# EAGLE board CT_schematic (EAGLE 7.6.0)

Size 100 x 80 mm. Coordinates in mm from the lower left corner, seen from the top.
Outline: 0,0 100,0 100,80 0,80 0,0
Copper layers (1*16): Top 0.035mm / dielectric 1.5mm / Bottom 0.035mm
Design rules "default": minimum track width 10mil, minimum drill 24mil, track to track 8mil, track to pad 8mil, pad to pad 8mil, via to via 8mil, smd to smd 8mil, copper to edge 40mil, drill to drill 8mil, minimum pad ring 10mil, minimum via ring 8mil, stop-mask expansion 4mil, vias tented up to drill 0mil, thermal gap 10mil

## Footprints (pad centres in the part's own frame; a part is rotated, then mirrored left to right if it is on the bottom)
C0603 = smd 0.8 x 0.8: 1 -0.762,0; 2 0.762,0
C0402 = smd 0.5 x 0.5: 1 -0.508,0; 2 0.508,0
C0805 = smd 1.2 x 1.3: 1 -1.016,0; 2 1.016,0
EXV-9B = smd 2.718 x 1.778: 1 -2.108,0; 2 2.108,0
EXV-9H = smd 3.505 x 1.676: 1 -2.857,0; 2 2.857,0
PJ-037B_PACKAGE = drill 3.7 square: 1 12,0 | drill 3.2 square: 2 6,0
R0603 = smd 0.8 x 0.8: 1 -0.762,0; 2 0.762,0
WLCSP64 = smd 0.34 x 0.34: A1 -1.75,1.75; A2 -1.25,1.75; A3 -0.75,1.75; A4 -0.25,1.75; A5 0.25,1.75; A6 0.75,1.75; A7 1.25,1.75; A8 1.75,1.75; B1 -1.75,1.25; B2 -1.25,1.25; B3 -0.75,1.25; B4 -0.25,1.25; B5 0.25,1.25; B6 0.75,1.25; B7 1.25,1.25; B8 1.75,1.25; C1 -1.75,0.75; C2 -1.25,0.75; C3 -0.75,0.75; C4 -0.25,0.75; C5 0.25,0.75; C6 0.75,0.75; C7 1.25,0.75; C8 1.75,0.75; D1 -1.75,0.25; D2 -1.25,0.25; D3 -0.75,0.25; D4 -0.25,0.25; D5 0.25,0.25; D6 0.75,0.25; D7 1.25,0.25; D8 1.75,0.25; E1 -1.75,-0.25; E2 -1.25,-0.25; E3 -0.75,-0.25; E4 -0.25,-0.25; E5 0.25,-0.25; E6 0.75,-0.25; E7 1.25,-0.25; E8 1.75,-0.25; F1 -1.75,-0.75; F2 -1.25,-0.75; F3 -0.75,-0.75; F4 -0.25,-0.75; F5 0.25,-0.75; F6 0.75,-0.75; F7 1.25,-0.75; F8 1.75,-0.75; G1 -1.75,-1.25; G2 -1.25,-1.25; G3 -0.75,-1.25; G4 -0.25,-1.25; G5 0.25,-1.25; G6 0.75,-1.25; G7 1.25,-1.25; G8 1.75,-1.25; H1 -1.75,-1.75; H2 -1.25,-1.75; H3 -0.75,-1.75; H4 -0.25,-1.75; H5 0.25,-1.75; H6 0.75,-1.75; H7 1.25,-1.75; H8 1.75,-1.75
10100565 = smd 0.8 x 2.35: 1 0,0; 2 1.25,0; 3 2.55,0; 4 4.25,0; 5 5.43,0; 6 6.68,0; 7 7.93,0; 8 9.18,0; 9 11.67,0; 10 14.18,0; 11 15.43,0; 12 16.68,0; 13 17.93,0; 14 19.18,0; 15 21.68,0 | smd 1.5 x 3.1: 16 23.495,-1.375; 20 25.685,-22.875 | smd 1.55 x 3.1: 17 -1.815,-1.375; 21 -1.815,-22.875 | drill 1.1 pad 1.1: 18 21.68,-2.375; 19 0.68,-2.375
DFN8-S = smd 0.6 x 0.4: 1 -2.69,1.905; 2 -2.69,0.635; 3 -2.69,-0.635; 4 -2.69,-1.905; 5 2.69,-1.905; 6 2.69,-0.635; 7 2.69,0.635; 8 2.69,1.905
WNG008 = smd 0.45 x 0.55: 1 -1.27,0; 2 0,0; 3 1.27,0; 4 2.54,0; 5 2.54,7.5; 6 1.27,7.5; 7 0,7.5; 8 -1.27,7.53 | smd 4.9 x 4.75: PAD 0.635,3.75
SOIC-8 = smd 1.6 x 0.6: 1 -2.7,1.905 | smd 1.55 x 0.6: 2 -2.7,0.635; 3 -2.7,-0.635; 4 -2.7,-1.905; 5 2.7,-1.905; 6 2.7,-0.635; 7 2.7,0.635; 8 2.7,1.905
182-009-MALE = drill 1.194 pad 1.524 octagon: 1 -5.537,10.923; 2 -2.769,10.923; 3 0,10.923; 4 2.769,10.923; 5 5.537,10.923; 6 -4.153,8.08; 7 -1.384,8.08; 8 1.384,8.08; 9 4.153,8.08 | hole 3.048: -12.446,9.501; 12.446,9.501
WFDN-8 = smd 0.48 x 0.7: 1 0,0; 2 1.27,0; 3 2.54,0; 4 3.81,0; 5 3.81,4.45; 6 2.54,4.45; 7 1.27,4.45; 8 0,4.45 | smd 4 x 3: 9 1.89,2.25
ASEK = smd 1.4 x 1: 1 -1.1,-0.8; 2 1.1,-0.8; 3 1.1,0.8; 4 -1.1,0.8
ASFL1 = smd 1.7 x 1.5: 1 -1.27,-1.1; 2 1.27,-1.1; 3 1.27,1.1; 4 -1.27,1.1
LP2954 = smd 1.6 x 0.6: 1 -2.475,1.905 | smd 1.55 x 0.6: 2 -2.475,0.635; 3 -2.475,-0.635; 4 -2.475,-1.905; 5 2.475,-1.905; 6 2.475,-0.635; 7 2.475,0.635; 8 2.475,1.905
SON-6 = smd 0.55 x 0.3: 1 -0.355,0.5 | smd 0.52 x 0.3: 2 -0.37,0; 3 -0.37,-0.5; 4 0.37,-0.5; 5 0.37,0; 6 0.37,0.5
SW_4-1437565-2 = smd 1.4 x 2.1: 1 -2.23,4.55; 2 -2.23,-4.55; 3 2.23,4.55; 4 2.23,-4.55
LGM67K-G1J2-24-Z = smd 0.8 x 1.4: A -2,0; C 0,0
NC7SZ125M5X = smd 1.3 x 0.7: 1 -1.3,0.95; 2 -1.3,0; 3 -1.3,-0.95; 4 1.3,-0.95; 5 1.3,0.95

## Placement (x,y rotation side)
C1  1e-06  [C0603]  -15.24,85.09 0 top  (outside the outline)
C2  1e-07  [C0603]  -19.05,85.09 0 top  (outside the outline)
C3  1e-07  [C0603]  -22.86,85.09 0 top  (outside the outline)
C4  1e-07  [C0603]  -26.67,85.09 0 top  (outside the outline)
C5  1e-07  [C0603]  -30.48,85.09 0 top  (outside the outline)
C6  1e-07  [C0603]  -34.29,85.09 0 top  (outside the outline)
C7  4.7e-06  [C0603]  -80.01,80.01 0 top  (outside the outline)
C8  1e-08  [C0603]  -38.1,85.09 0 top  (outside the outline)
C9  1e-06  [C0603]  -41.91,85.09 0 top  (outside the outline)
C10  1e-07  [C0603]  -45.72,85.09 0 top  (outside the outline)
C11  1e-07  [C0402]  -72.39,85.09 0 top  (outside the outline)
C12  1e-05  [C0805]  -63.5,67.31 0 top  (outside the outline)
C13  1e-08  [C0402]  -76.2,85.09 0 top  (outside the outline)
C14  1e-08  [C0402]  -80.01,85.09 0 top  (outside the outline)
C15  1e-07  [C0402]  -15.24,90.17 0 top  (outside the outline)
C16  1e-07  [C0402]  -19.05,90.17 0 top  (outside the outline)
C17  1e-08  [C0402]  -22.86,90.17 0 top  (outside the outline)
C18  1e-08  [C0402]  -26.67,90.17 0 top  (outside the outline)
C19  1e-06  [EXV-9B]  -40.64,67.31 0 top  (outside the outline)
C20  2.2e-06  [EXV-9B]  -49.53,67.31 0 top  (outside the outline)
C21  1e-07  [C0402]  -30.48,90.17 0 top  (outside the outline)
C22  0.0001  [EXV-9H]  -71.12,58.42 0 top  (outside the outline)
C23  0.0001  [EXV-9H]  -17.78,68.58 0 top  (outside the outline)
C24  1e-08  [C0402]  -34.29,90.17 0 top  (outside the outline)
J1  PJ-037B  [PJ-037B_PACKAGE]  -27.94,36.83 0 top  (outside the outline)
R2  1000.0  [R0603]  -49.53,85.09 0 top  (outside the outline)
R4  4700.0  [R0603]  -53.34,85.09 0 top  (outside the outline)
R5  2200.0  [R0603]  -57.15,85.09 0 top  (outside the outline)
R6  2200.0  [R0603]  -60.96,85.09 0 top  (outside the outline)
R7  10000.0  [R0603]  -35.56,80.01 0 top  (outside the outline)
R8  100000.0  [R0603]  -73.66,66.04 0 top  (outside the outline)
R9  100000.0  [R0603]  -78.74,66.04 0 top  (outside the outline)
R10  100000.0  [R0603]  -15.24,74.93 0 top  (outside the outline)
R11  100000.0  [R0603]  -20.32,74.93 0 top  (outside the outline)
R12  100000.0  [R0603]  -25.4,74.93 0 top  (outside the outline)
R13  100000.0  [R0603]  -30.48,74.93 0 top  (outside the outline)
R14  100000.0  [R0603]  -35.56,74.93 0 top  (outside the outline)
R15  100000.0  [R0603]  -40.64,74.93 0 top  (outside the outline)
R16  100000.0  [R0603]  -45.72,74.93 0 top  (outside the outline)
R17  100000.0  [R0603]  -50.8,74.93 0 top  (outside the outline)
R18  100000.0  [R0603]  -55.88,74.93 0 top  (outside the outline)
R19  10000.0  [R0603]  -40.64,80.01 0 top  (outside the outline)
R20  10000.0  [R0603]  -45.72,80.01 0 top  (outside the outline)
R21  10000.0  [R0603]  -50.8,80.01 0 top  (outside the outline)
R22  10000.0  [R0603]  -55.88,80.01 0 top  (outside the outline)
R23  10000.0  [R0603]  -60.96,80.01 0 top  (outside the outline)
R24  10000.0  [R0603]  -66.04,80.01 0 top  (outside the outline)
R25  120.0  [R0603]  -64.77,85.09 0 top  (outside the outline)
R26  470000.0  [R0603]  -60.96,74.93 0 top  (outside the outline)
R27  100000.0  [R0603]  -66.04,74.93 0 top  (outside the outline)
R28  100000.0  [R0603]  -71.12,74.93 0 top  (outside the outline)
R29  100000.0  [R0603]  -76.2,74.93 0 top  (outside the outline)
R30  100000.0  [R0603]  -81.28,74.93 0 top  (outside the outline)
R31  100000.0  [R0603]  -15.24,80.01 0 top  (outside the outline)
R32  164658.62  [R0603]  -68.58,66.04 0 top  (outside the outline)
R33  100000.0  [R0603]  -20.32,80.01 0 top  (outside the outline)
R34  10000.0  [R0603]  -71.12,80.01 0 top  (outside the outline)
R35  10000.0  [R0603]  -76.2,80.01 0 top  (outside the outline)
R36  9100.0  [R0603]  -68.58,85.09 0 top  (outside the outline)
R37  680000.0  [R0603]  -25.4,80.01 0 top  (outside the outline)
R38  120000.0  [R0603]  -30.48,80.01 0 top  (outside the outline)
U1  STM32L433RBY6  [WLCSP64]  -41.91,59.69 0 top  (outside the outline)
U2  10100565  [10100565]  -40.64,25.4 0 top  (outside the outline)
U3  24AA512-I/MF  [DFN8-S]  -43.18,49.53 0 top  (outside the outline)
U4  S25FL128SDPNFI001  [WNG008]  -64.77,33.02 0 top  (outside the outline)
U5  SN65HVD230D  [SOIC-8]  -72.39,48.26 0 top  (outside the outline)
U6  182-009-113R531  [182-009-MALE]  -67.31,6.35 0 top  (outside the outline)
U7  SST26VF032B-104I/MF  [WFDN-8]  -31.75,46.99 0 top  (outside the outline)
U8  ASEK-32.768KHz-ECST  [ASEK]  -62.23,58.42 0 top  (outside the outline)
U9  ASFL1-25MHZ-NCS  [ASFL1]  -26.67,59.69 0 top  (outside the outline)
U10  LP2954AIMX/NOPB  [LP2954]  -58.42,48.26 0 top  (outside the outline)
U11  TPS3895ADRYR  [SON-6]  -36.83,88.9 0 top  (outside the outline)
U12  4-1437565-2  [SW_4-1437565-2]  -44.45,35.56 0 top  (outside the outline)
U13  Q65110A2395  [LGM67K-G1J2-24-Z]  -27.94,67.31 0 top  (outside the outline)
U14  nc7sz125m5x  [NC7SZ125M5X]  -57.15,66.04 0 top  (outside the outline)

## Library data of the parts
C1-C24 J1 R2 R4-R38 U1-U14 = circuit_tree

## Nets
CLK_U1_C8: U1.C8 U8.3
CLK_U1_D8: U1.D8 U9.3
GND: C1.2 C2.2 C3.2 C4.2 C5.2 C6.2 C7.2 C8.2 C9.2 C10.2 C11.2 C12.2 C13.2 C14.2 C15.2 C16.2 C17.2 C18.2 C19.2 C20.2 C21.2 C22.2 C23.2 C24.2 J1.2 R2.2 R7.2 R20.2 R26.2 R33.2 R36.2 R38.2 U1.A7 U1.B1 U1.F8 U1.H2 U1.H8 U2.6 U2.10 U2.12 U2.16 U2.17 U2.20 U2.21 U3.4 U3.7 U4.4 U4.PAD U5.2 U6.5 U7.4 U7.9 U8.2 U9.2 U10.4 U11.2 U13.C U14.1 U14.3
NET_U1_A6: R6.1 U1.A6 U3.5
NET_U1_B5: R5.1 U1.B5 U3.6
NET_U1_C5: R7.1 U1.C5
NET_U1_D6: R4.1 U1.D6 U14.4
NET_U1_H3: U13.A
NET_U1_H4: U12.3 U12.4
NET_U2_1: R10.1 U2.1
NET_U2_2: R9.1 U2.2
NET_U2_18: U2.18 U2.19
NET_U3_1: R19.1 U3.1
NET_U3_2: R20.1 U3.2
NET_U3_3: R21.1 U3.3
NET_U4_3: R22.1 U4.3
NET_U4_7: R24.1 U4.7
NET_U5_6: R25.2 U5.6
NET_U5_8: R26.1 U5.8
NET_U6_2: R25.2 U5.6 U6.2
NET_U6_3: R25.1 U5.7 U6.3
NET_U10_3: R31.1 U10.3
NET_U10_5: R30.1 U10.5
NET_U10_7: R32.2 R33.1 U10.7
NET_U11_1: R35.1 R36.1 U11.1
NET_U11_3: R37.2 R38.1 U11.3
NET_U11_4: R34.1 U11.4 U14.2
NET_U12_1: R2.1 U12.1 U12.2
PROC_CAN1_RX: U1.D3 U5.4
PROC_CAN1_TX: U1.C1 U5.1
PROC_QUADSPI_BK1_IO0: U1.H5 U7.5
PROC_QUADSPI_BK1_IO1: U1.F4 U7.2
PROC_QUADSPI_BK1_IO2: R28.1 U1.H6 U7.3
PROC_QUADSPI_BK1_IO3: R29.1 U1.G5 U7.7
PROC_QUADSPI_BK1_NCS: R27.1 U1.F6 U7.1
PROC_QUADSPI_CLK: U1.G6 U7.6
PROC_SDMMC1_CK: R8.1 U1.A3 U2.8
PROC_SDMMC1_D0: R11.1 U1.F3 U2.4
PROC_SDMMC1_D1: R12.1 U1.E2 U2.3
PROC_SDMMC1_D2: R13.1 U1.C3 U2.15
PROC_SDMMC1_D3: R14.1 U1.B3 U2.14
PROC_SDMMC1_D4: R15.1 U1.C6 U2.13
PROC_SDMMC1_D5: R16.1 U1.B6 U2.11
PROC_SDMMC1_D6: R17.1 U1.F1 U2.7
PROC_SDMMC1_D7: R18.1 U1.E1 U2.5
PROC_SPI1_MISO: U4.2
PROC_SPI1_MOSI: U4.5
PROC_SPI1_NSS: R23.1 U4.1
PROC_SPI1_SCK: U4.6
VCC_S1_6V4: C19.1 C22.1 C23.1 J1.1 R31.2 U10.8
VCC_TIER1_3V3: C1.1 C2.1 C3.1 C4.1 C5.1 C6.1 C7.1 C8.1 C9.1 C10.1 C11.1 C12.1 C13.1 C14.1 C15.1 C16.1 C17.1 C18.1 C20.1 C21.1 C24.1 R4.2 R5.2 R6.2 R8.2 R9.2 R10.2 R11.2 R12.2 R13.2 R14.2 R15.2 R16.2 R17.2 R18.2 R19.2 R21.2 R22.2 R23.2 R24.2 R27.2 R28.2 R29.2 R30.2 R32.1 R34.2 R35.2 R37.1 U1.A1 U1.A8 U1.B7 U1.G8 U1.H1 U1.H7 U2.9 U3.8 U4.8 U5.3 U7.8 U8.4 U9.4 U10.1 U11.6 U14.5

## Tracks (layer width: path | path; a pad name or v marks a point on that pad's centre or on a via)
CLK_U1_C8  (1 unrouted)
CLK_U1_D8  (1 unrouted)
GND  (58 unrouted)
NET_U1_A6  (2 unrouted)
NET_U1_B5  (2 unrouted)
NET_U1_C5  (1 unrouted)
NET_U1_D6  (2 unrouted)
NET_U1_H4  (1 unrouted)
NET_U2_1  (1 unrouted)
NET_U2_2  (1 unrouted)
NET_U2_18  (1 unrouted)
NET_U3_1  (1 unrouted)
NET_U3_2  (1 unrouted)
NET_U3_3  (1 unrouted)
NET_U4_3  (1 unrouted)
NET_U4_7  (1 unrouted)
NET_U5_6  (1 unrouted)
NET_U5_8  (1 unrouted)
NET_U6_2  (2 unrouted)
NET_U6_3  (2 unrouted)
NET_U10_3  (1 unrouted)
NET_U10_5  (1 unrouted)
NET_U10_7  (2 unrouted)
NET_U11_1  (2 unrouted)
NET_U11_3  (2 unrouted)
NET_U11_4  (2 unrouted)
NET_U12_1  (2 unrouted)
PROC_CAN1_RX  (1 unrouted)
PROC_CAN1_TX  (1 unrouted)
PROC_QUADSPI_BK1_IO0  (1 unrouted)
PROC_QUADSPI_BK1_IO1  (1 unrouted)
PROC_QUADSPI_BK1_IO2  (2 unrouted)
PROC_QUADSPI_BK1_IO3  (2 unrouted)
PROC_QUADSPI_BK1_NCS  (2 unrouted)
PROC_QUADSPI_CLK  (1 unrouted)
PROC_SDMMC1_CK  (2 unrouted)
PROC_SDMMC1_D0  (2 unrouted)
PROC_SDMMC1_D1  (2 unrouted)
PROC_SDMMC1_D2  (2 unrouted)
PROC_SDMMC1_D3  (2 unrouted)
PROC_SDMMC1_D4  (2 unrouted)
PROC_SDMMC1_D5  (2 unrouted)
PROC_SDMMC1_D6  (2 unrouted)
PROC_SDMMC1_D7  (2 unrouted)
PROC_SPI1_NSS  (1 unrouted)
VCC_S1_6V4  (5 unrouted)
VCC_TIER1_3V3  (63 unrouted)